# Altium PCB PCB_Tutorial_REV1.PcbDoc
Units mm, origin at the board's own origin, x right, y up, seen from the top; angles counter-clockwise.
Board outline 50.29 x 50.04 mm, 4 copper layers (Sig + GND Top, GND, PWR, Sig + GND Bot), stack 1.57 mm thick; 14 components, 11 nets, 50 pads, 1 vias.
Unrouted connection lines stored in the file: 16.
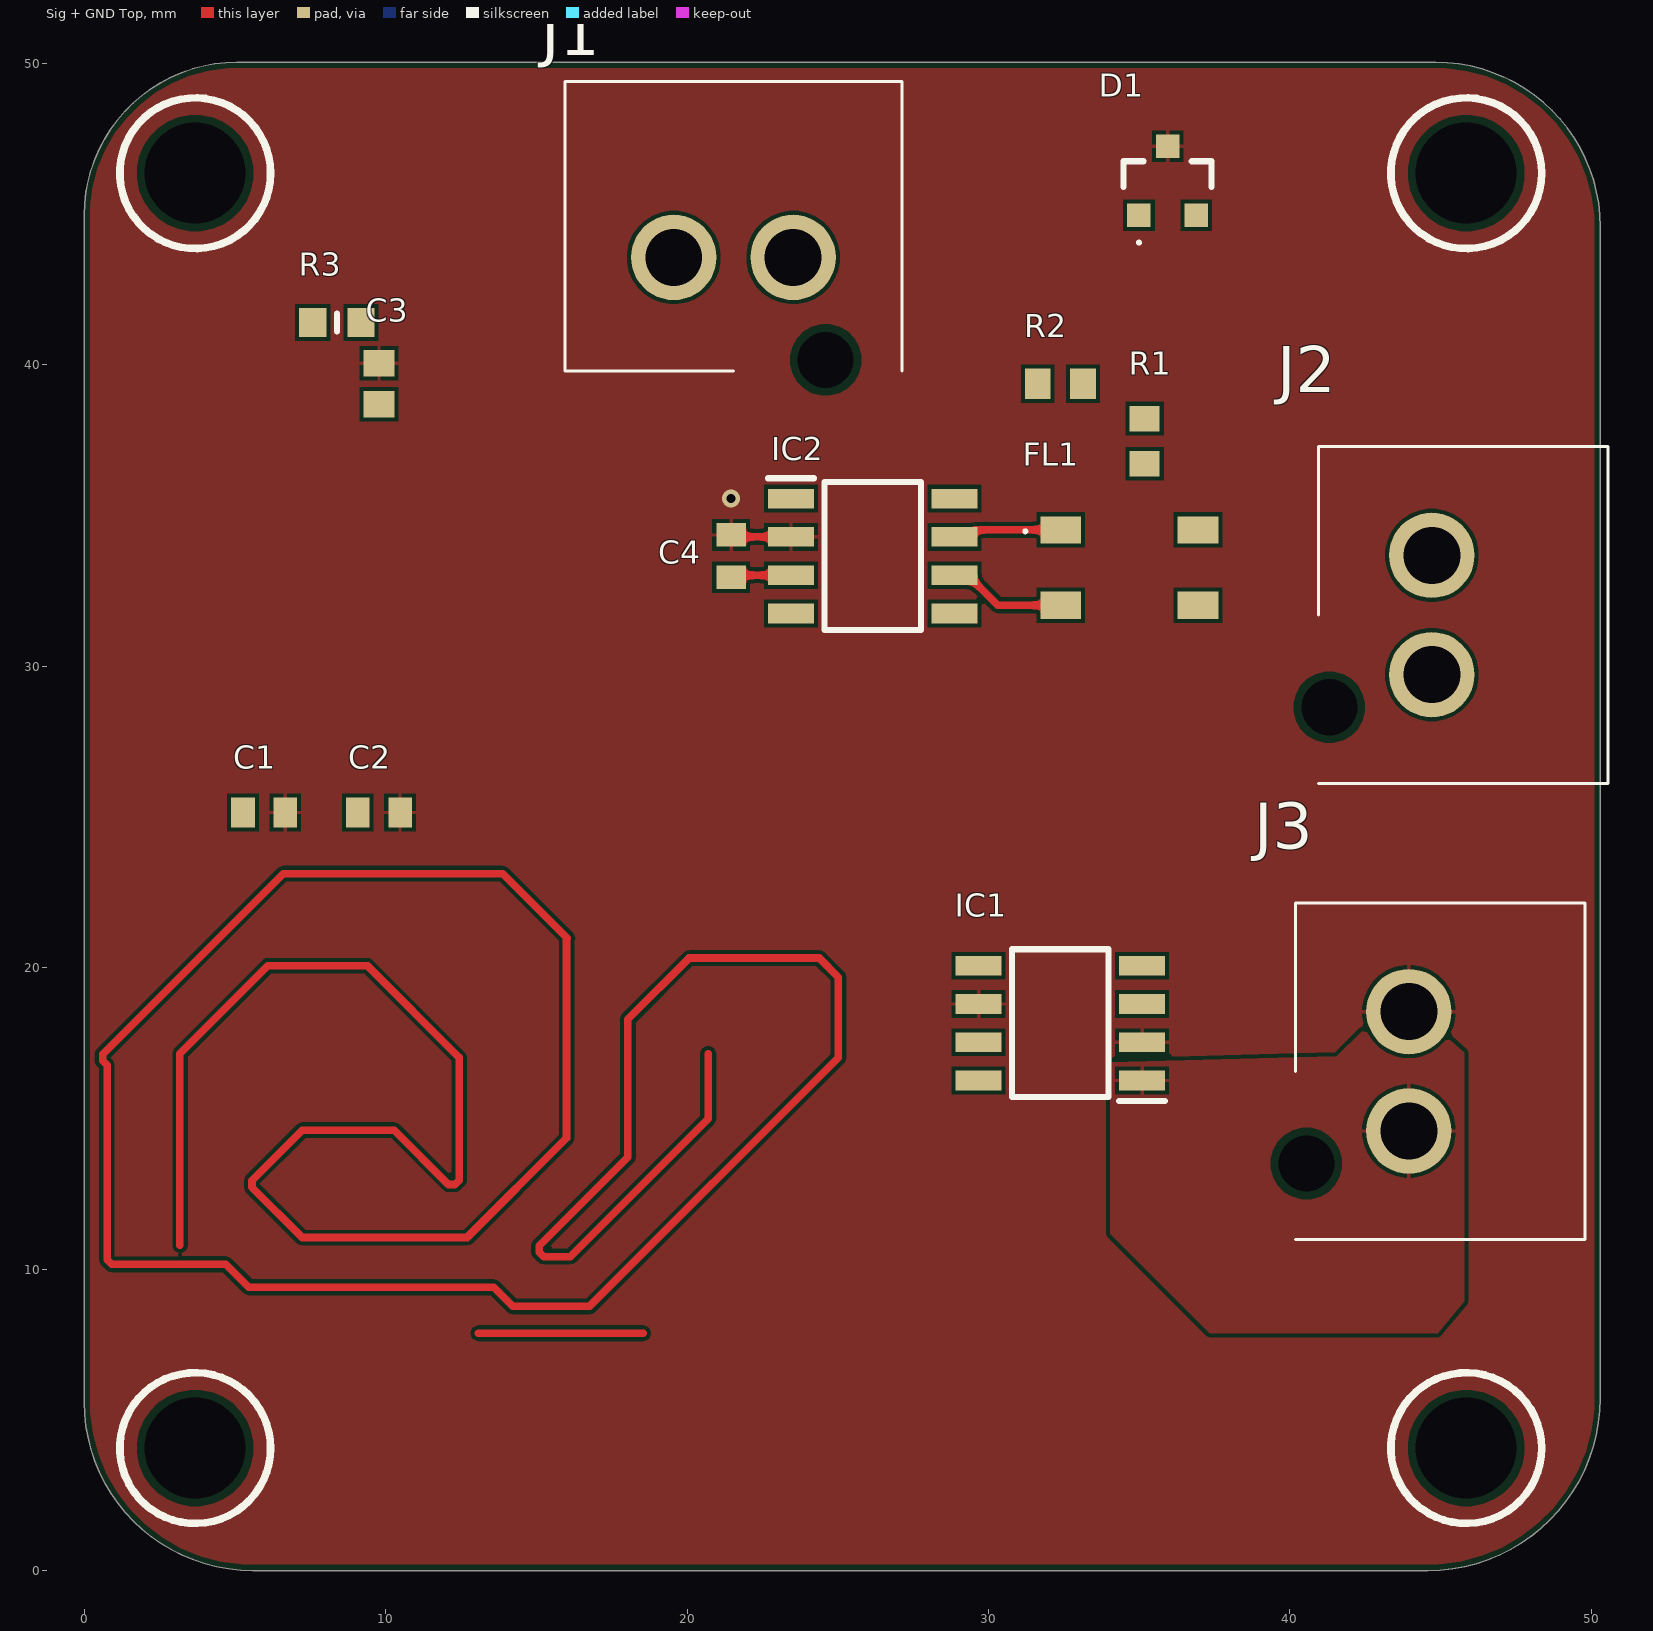
[diagram p0: Sig + GND Top view]
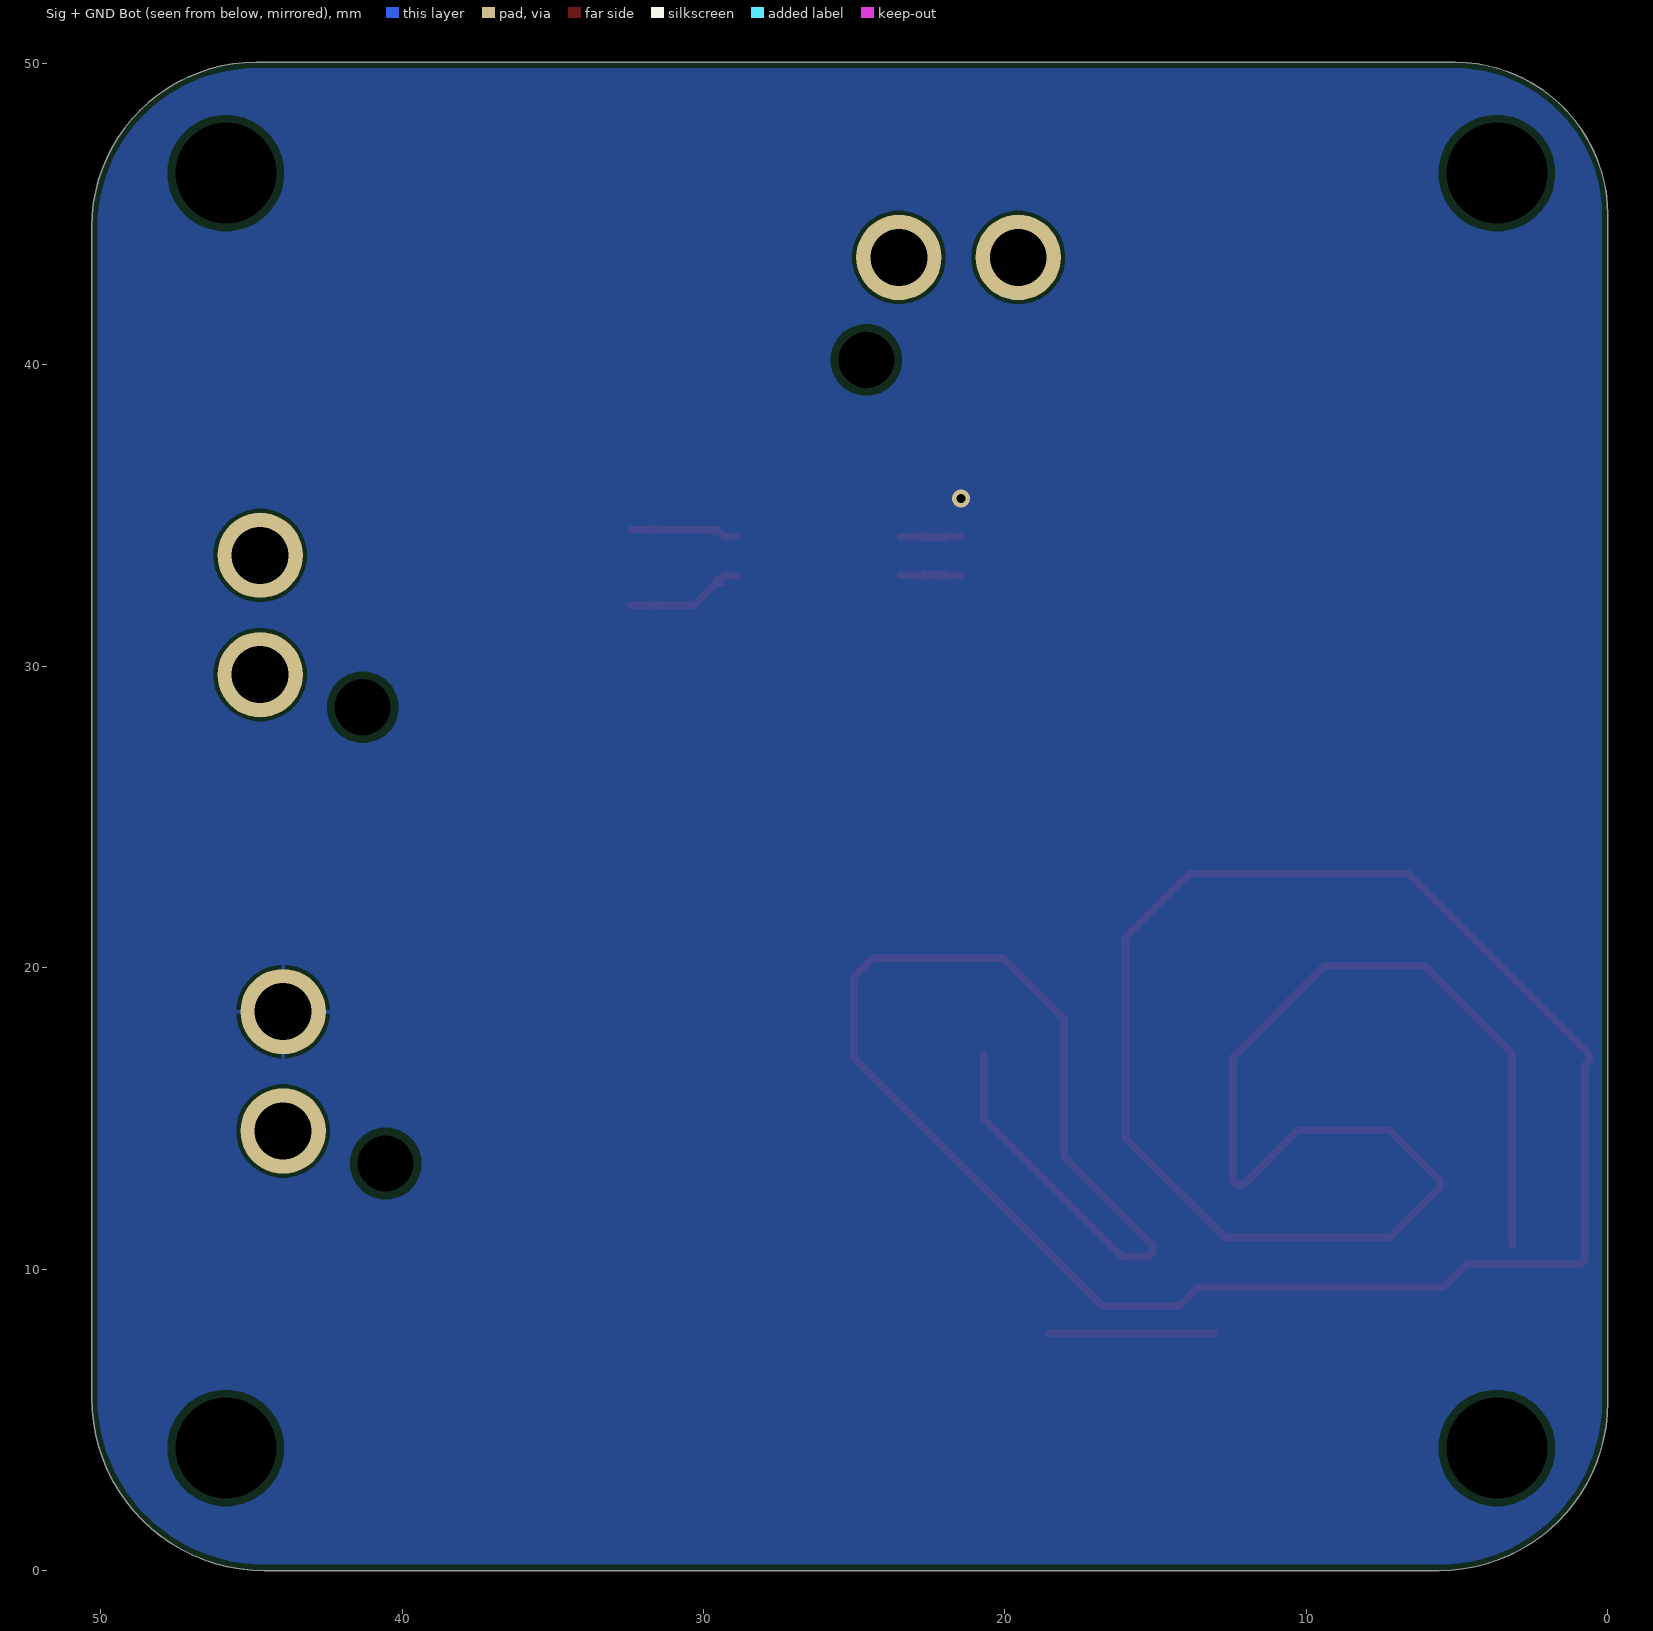
[diagram p1: Sig + GND Bot view, seen from below]
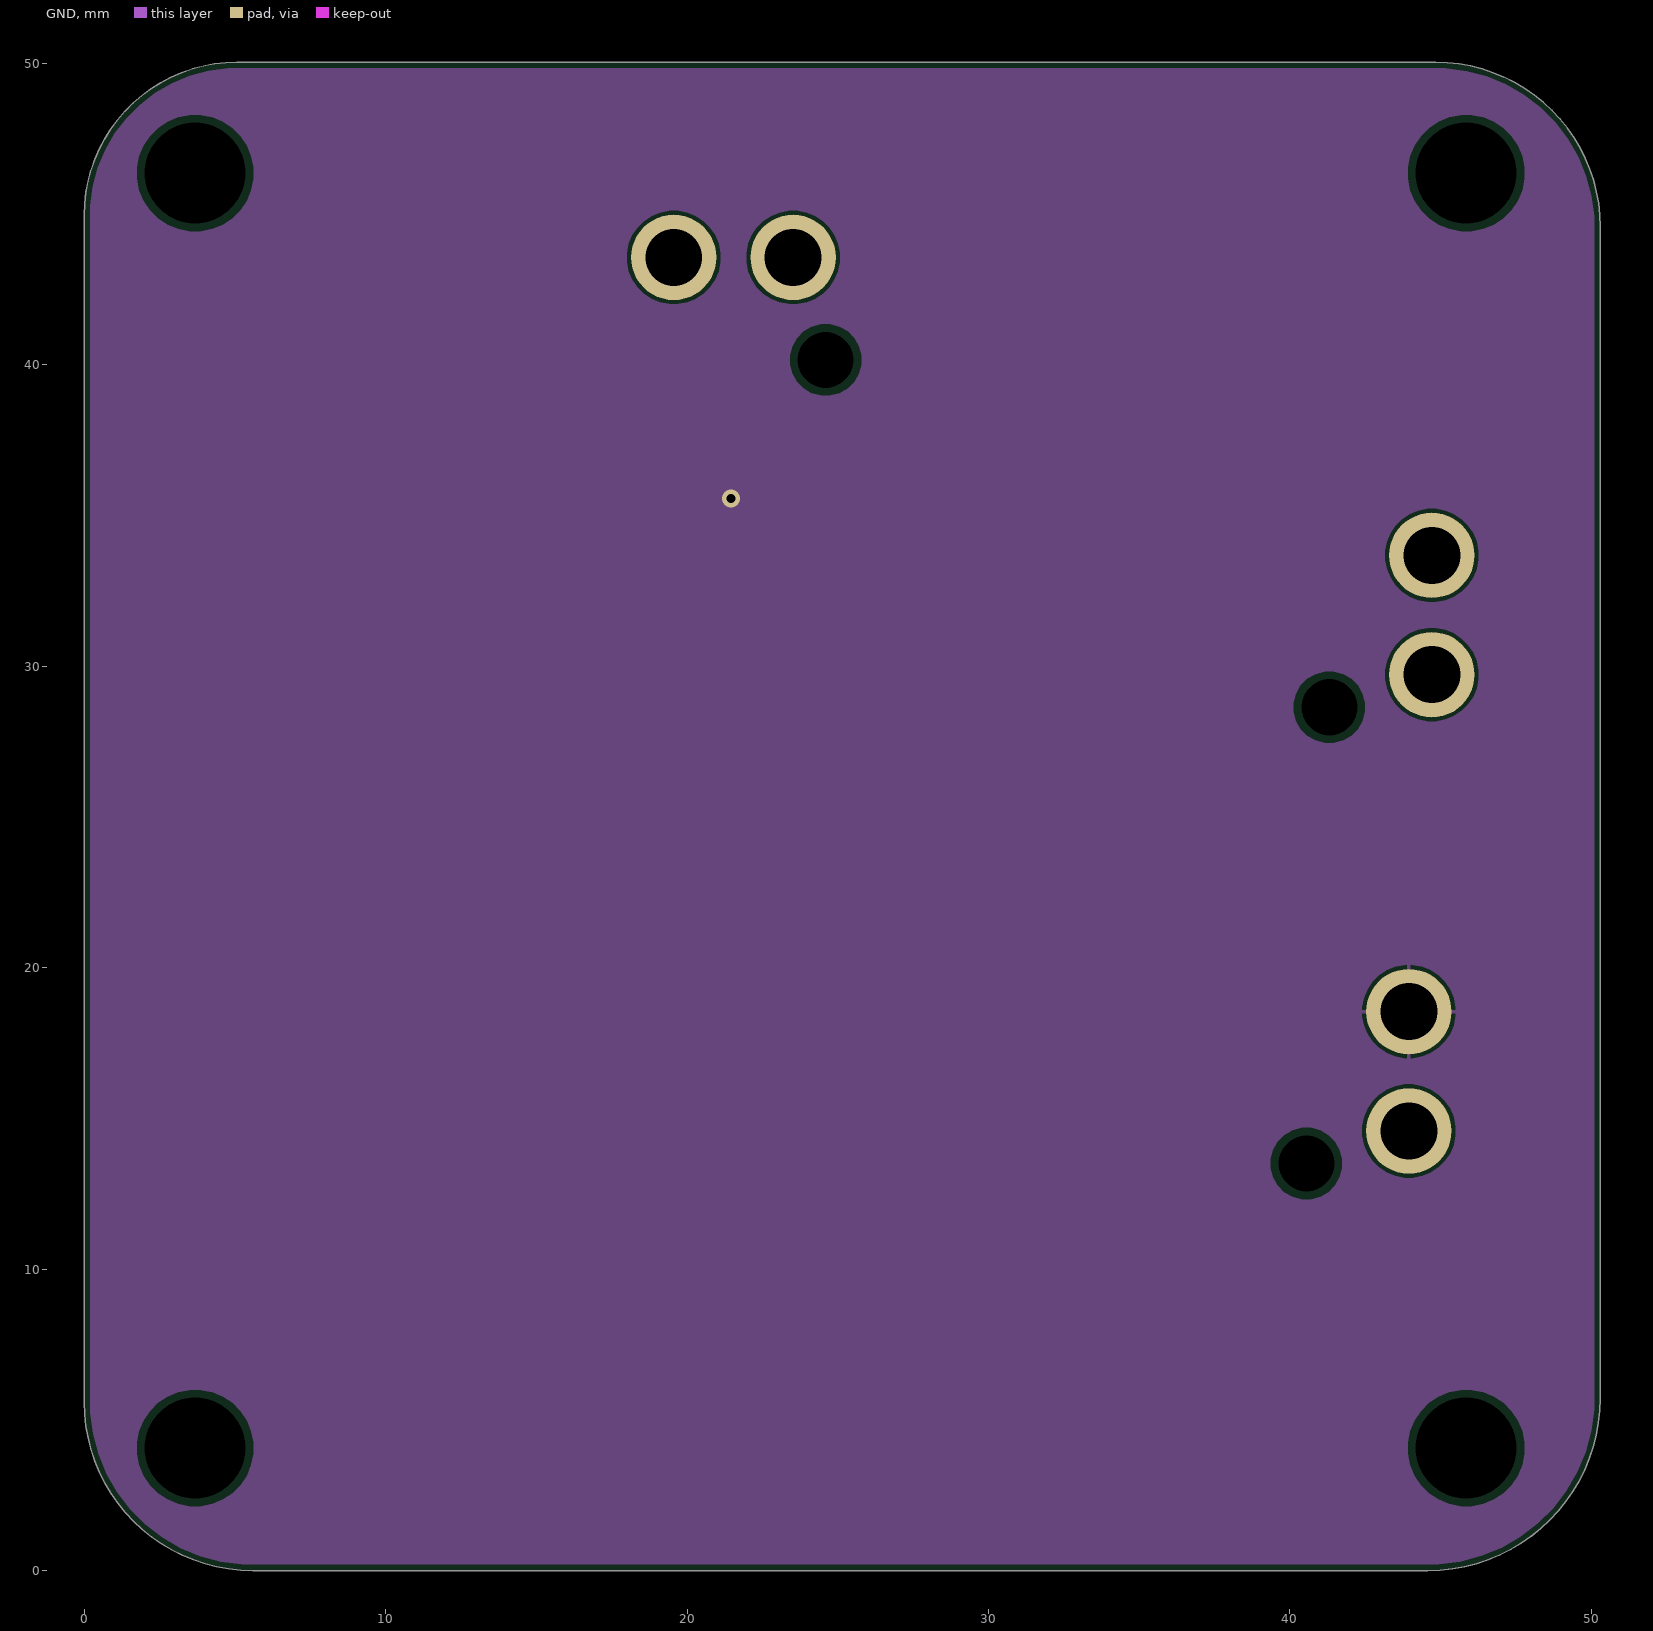
[diagram p2: GND]
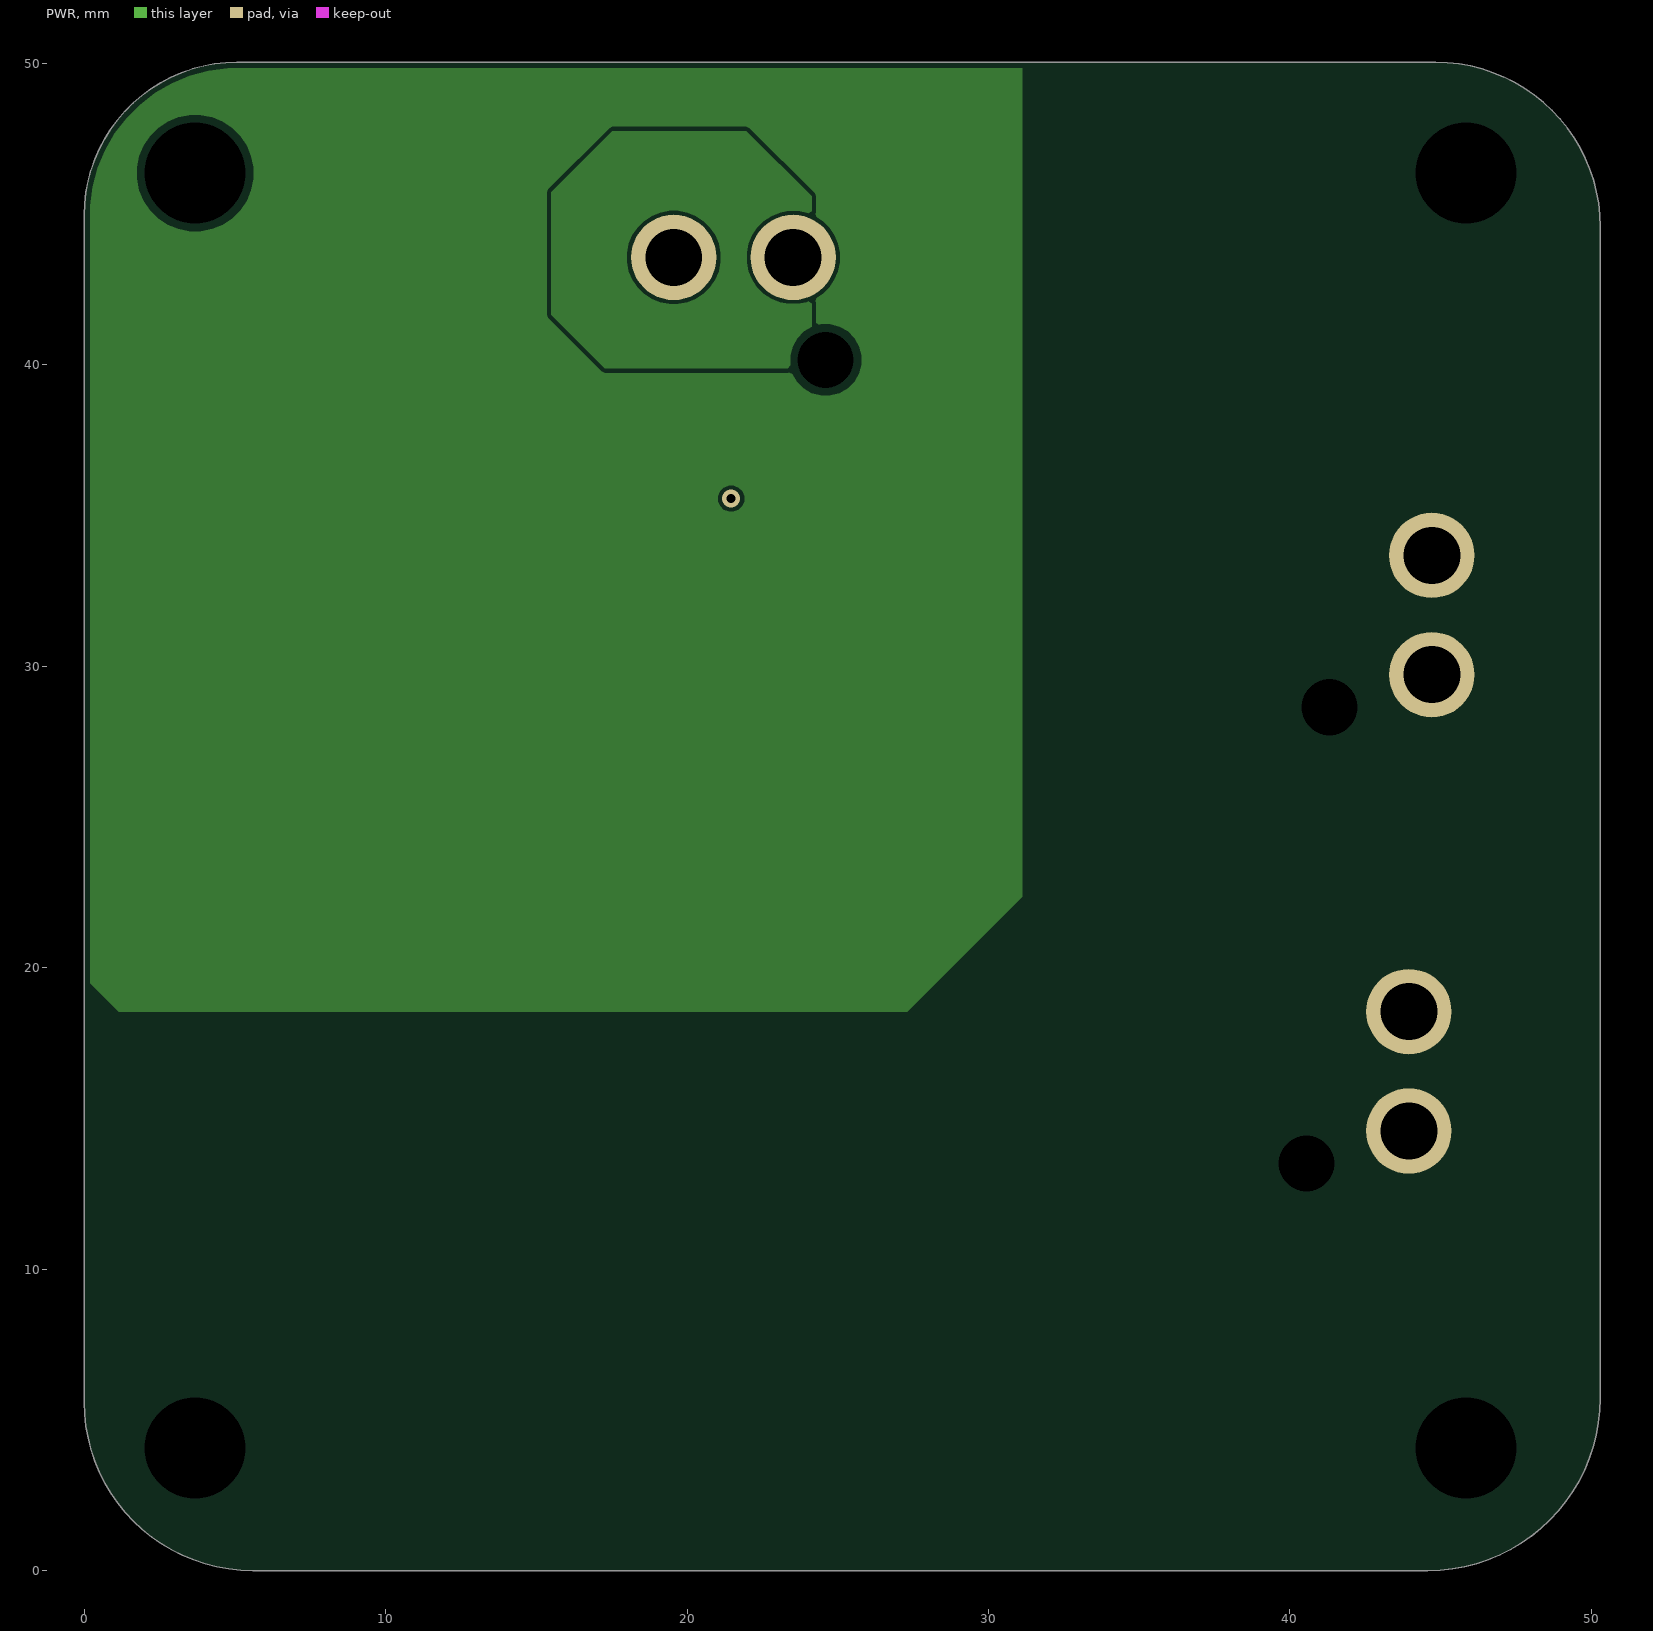
[diagram p3: PWR]

## Layer stack, top to bottom
Top Solder: solder mask 0.0127, Solder Resist, Dk 3.8
Sig + GND Top: signal copper 0.035
Dielectric 1: prepreg 0.2, 7628, Dk 4.6
GND: signal copper 0.0175
Core: core 1.065, FR-4, Dk 4.5
PWR: signal copper 0.0175
Dielectric 2: prepreg 0.2, 7628, Dk 4.6
Sig + GND Bot: signal copper 0.035
Bottom Solder: solder mask 0.0127, Solder Resist, Dk 3.8

## Board outline
0,5.588 0,44.958 cw(c5.08,44.958) 5.08,50.038 44.831,50.038 cw(c44.831,44.577) 50.292,44.577 50.292,5.715 cw(c44.577,5.715) 44.577,0 5.588,0 cw(c5.588,5.588)

## Design rules (kind name [scope] priority, off if disabled: settings)
BoardOutlineClearance [All] p1: gap=0.2 ignorepadtopadclearanceinfootprint=FALSE
Clearance [All] p1: gap=0.127 ignorepadtopadclearanceinfootprint=FALSE except(0.25: Arc-Hole Track-Hole SMDPad-Hole THPad-Hole Via-Hole Fill-Hole Poly-Hole Region-Hole Text-Hole)
ComponentClearance [All] p1: gap=0.127 collisioncheckmode=3 verticalgap=0.127 showdistances=TRUE
DiffPairsRouting [All] p1: maxlimit=0.254 minlimit=0.127 mostfreqgap=0.254 toplayer_prefgap=0.127 toplayer_minwidth=0.127 toplayer_maxwidth=25.4 toplayer_prefwidth=0.127 midlayer1_mingap=0.254 midlayer1_minwidth=0.381 midlayer1_maxwidth=0.381 midlayer1_prefwidth=0.381 midlayer2_mingap=0.254 midlayer2_minwidth=0.381 midlayer2_maxwidth=0.381 midlayer2_prefwidth=0.381 bottomlayer_prefgap=0.127 bottomlayer_minwidth=0.127 bottomlayer_maxwidth=25.4 bottomlayer_prefwidth=0.127 maxuncoupledlength=12.7
Height [All] p1: minheight=0 maxheight=1816.048 prefheight=12.7
HoleSize [All] p1: absolutevalues=TRUE maxlimit=6.3 minlimit=0.3 maxpercent=80.000 minpercent=20.000
HoleToHoleClearance [All] p1: gap=0.25 allowstackedmicrovias=FALSE
MinimumAnnularRing [All] p1: minimumring=0.076
MinimumSolderMaskSliver [All] p1: minsoldermaskwidth=0
PlaneClearance [All] p1: clearance=0.127
PlaneConnect PlaneConnectPowerPads [InPadClass('PowerPads')] p1: planeconnectstyle=Direct reliefexpansion=0.508 reliefentries=4 reliefconductorwidth=0.254 reliefairgap=0.254
PlaneConnect [All] p2: pad.planeconnectstyle=Relief pad.reliefexpansion=0.3 pad.reliefentries=4 pad.reliefconductorwidth=0.127 pad.reliefairgap=0.127 via.planeconnectstyle=Direct via.reliefexpansion=0.3 via.reliefentries=4 via.reliefconductorwidth=0.127 via.reliefairgap=0.127
PolygonConnect PolygonConnectPowerPads [All vs (InPadClass('PowerPads'))] p1: connectstyle=Direct reliefconductorwidth=0.254 reliefentries=4 polygonreliefangle="90 Angle" airgapwidth=0.254
PolygonConnect [All] p2: thpad.connectstyle=Relief thpad.reliefconductorwidth=0.127 thpad.reliefentries=4 thpad.polygonreliefangle="90 Angle" thpad.airgapwidth=0.127 smdpad.connectstyle=Relief smdpad.reliefconductorwidth=0.127 smdpad.reliefentries=4 smdpad.polygonreliefangle="90 Angle" smdpad.airgapwidth=0.127 via.connectstyle=Direct via.reliefconductorwidth=0.127 via.reliefentries=4 via.polygonreliefangle="90 Angle" via.airgapwidth=0.127
RoutingVias [All] p1: holewidth=0.3 width=0.6 viastyle="Through Hole" minholewidth=0.3 minwidth=0.6 maxholewidth=0.6 maxwidth=6.6
SilkToSilkClearance [All] p1: silktosilkclearance=0
SilkToSolderMaskClearance [IsPad] p1: minsilkscreentomaskgap=0.127 clearancetoexposedcopper=TRUE
SolderMaskExpansion [All] p1: expansion=0.075 istentingtop=FALSE
SupplyNets "Schematic Supply Nets" [InNet('GND')] p1: voltage=0.000
Width [All] p1: maxlimit=25.4 minlimit=0.127 preferedwidth=0.127 midlayer1_maxwidth=0.254 midlayer2_maxwidth=0.254 minimp=50.000000 maximp=50.000000 favimp=50.000000
20 further rules are at their usual default settings.

## Classes and differential pairs
differential pair class diffc: CAN CANC
differential pair class diffc1: CANC
component class "This is my A Schematic Document": C1 C2 C3 C4 D1 FL1 IC1 IC2 R1 R2 R3
component class Connectors: J1 J2 J3
differential pair CANC: +CANC_P -CANC_N
differential pair CAN: +CAN_P -CAN_N

## Components (designator, comment, footprint, x,y, rotation, side; value= is the part's Value field where it differs from the comment)
C1 "10u" CAPC1608X90N 5.969,25.146 r0 top
C2 "100n" CAPC1608X90N 9.779,25.146 r0 top
C3 "4.7n" CAPC1608X95N 9.779,39.37 r90 top
C4 "100n" CAPC1608X90N 21.463,33.655 r90 top
D1 "SM24CANB-02HTG" SM24CANB02HTG 35.941,46.101 r0 top
FL1 "ACT45B-510-2P-TL003" ACT45B1012PTL003 34.671,33.274 r0 top
IC1 "MCP3422A1T-E_SN" SOIC127P600X175-8N 32.385,18.161 r180 top
IC2 "TCAN337GD" SOIC127P600X175-8N 26.162,33.655 r0 top
J1 "1877285-2" 18772852 21.538,39.801 r180 top
J2 "1877285-2" 18772852 40.944,31.698 r90 top
J3 "1877285-2" 18772852 40.182,16.562 r90 top
R1 "60.4" RESC1608X50N 35.179,37.465 r90 top
R2 "60.4" RESC1608X50N 32.385,39.37 r0 top
R3 "10k" RESC1608X55N 8.382,41.402 r0 top

## Footprints (in the part's own frame and the unit in brackets; to place one, negate y for a bottom-side part, rotate by r counter-clockwise, add the part's x,y. Pads: shape width x height; smd on the part's side, far side on the other; paste and mask are expansions set on the pad)
18772852 [mm]
  round 2.835 hole 1.89: 1(-1.98,-3.76) 2(1.98,-3.76)
  round 0.93 hole 1.86 unplated: 3(-3.06,-0.36)
  silkscreen extent -5.59,-9.6 5.59,0, body extent -5.59,-9.58 5.59,0.3, height 11.91
ACT45B1012PTL003 [mm]
  rect 1.35x0.9 smd: 1(-2.275,1.25) 2(-2.275,-1.25) 3(2.275,-1.25) 4(2.275,1.25)
  silkscreen extent -3.5,1.15 -3.4,1.25, body extent -2.22,-1.6 2.28,1.6, height 2.8
CAPC1608X90N [mm]
  rect 0.78x0.99 smd: 1(-0.7,0) 2(0.7,0)
  body extent -0.76,-0.38 0.76,0.38, height 0.91
CAPC1608X95N [mm]
  rect 0.87x1.02 smd: 1(-0.68,0) 2(0.68,0)
  body extent -0.8,-0.4 0.8,0.4, height 0.95
RESC1608X50N [mm]
  rect 0.85x1 smd: 1(-0.75,0) 2(0.75,0)
  body extent -0.77,-0.43 0.78,0.42, height 0.45
RESC1608X55N [mm]
  rect 0.9x0.95 smd: 1(-0.8,0) 2(0.8,0)
  silkscreen extent 0,-0.3 0,0.3, body extent -0.8,-0.4 0.8,0.4, height 0.55
SM24CANB02HTG [mm]
  rect 0.78x0.78 smd: 1(-0.95,-1.145) 2(0.95,-1.145) 3(0,1.145)
  silkscreen extent -1.46,-2.1 1.46,0.65, body extent -1.46,-1.18 1.46,1.18, height 1.12
SOIC127P600X175-8N [mm]
  rect 1.525x0.65 smd: 1(-2.712,1.905) 2(-2.712,0.635) 3(-2.712,-0.635) 4(-2.712,-1.905) 5(2.712,-1.905) 6(2.712,-0.635) 7(2.712,0.635) 8(2.712,1.905)
  silkscreen extent -3.47,-2.45 1.6,2.58, body extent -3,-2.45 3,2.45, height 1.75

## Part data
C1: library part CL10A106KQ8NNNL, "Capacitor", Manufacturer_Name=SAMSUNG, Mouser Part Number=N/A, Arrow Part Number=CL10A106KQ8NNNL, Arrow Price/Stock=https://www.arrow.com/en/products/cl10a106kq8nnnl/samsung-electro-mechanics, Datasheet Link=https://product.samsungsem.com/mlcc/basic-search.do?partNumber=CL10A106KQ8NNN, Height=0.9mm, Manufacturer_Part_Number=CL10A106KQ8NNNL, Mouser Price/Stock=https://www.mouser.com/Search/Refine.aspx?Keyword=N%2FA
C2 C4: library part 06035C104J4Z2A, "Capacitor", Manufacturer_Name="Kyocera AVX", Mouser Part Number=581-06035C104J4Z2A, Arrow Part Number=06035C104J4Z2A, Arrow Price/Stock=https://www.arrow.com/en/products/06035c104j4z2a/avx, Datasheet Link=https://componentsearchengine.com/Datasheets/1/06031A100FAT2A.pdf, Height=0.9mm, Manufacturer_Part_Number=06035C104J4Z2A, Mouser Price/Stock=https://www.mouser.co.uk/ProductDetail/KYOCERA-AVX/06035C104J4Z2A?qs=Awwwc1gvTnlncvTGCFZvkw%3D%3D
C3: library part 0603B472M500CT, "Capacitor", Manufacturer_Name="Walsin Technology Corporation", Datasheet Link=https://www.passivecomponent.com/wp-content/uploads/datasheet/WTC_MLCC_General_Purpose.pdf, Height=0.95mm, Manufacturer_Part_Number=0603B472M500CT
D1: "TVS Diode (Bi-directional)", Manufacturer_Name=LITTELFUSE, Mouser Part Number=576-SM24CANB-02HTG, Arrow Part Number=SM24CANB-02HTG, Arrow Price/Stock=https://www.arrow.com/en/products/sm24canb-02htg/littelfuse?utm_currency=USD&region=nac, Datasheet Link=https://www.littelfuse.com/products/overvoltage-protection/tvs-diode-arrays/general-purpose/sm24canb/sm24canb-02htg, Height=1.12mm, Manufacturer_Part_Number=SM24CANB-02HTG, Mouser Price/Stock=https://www.mouser.co.uk/ProductDetail/Littelfuse/SM24CANB-02HTG?qs=bWsWnctWn1wbKmCYlcUmHw%3D%3D
FL1: "Filter", Manufacturer_Name=TDK, Mouser Part Number=810-ACT45B5102PTL003, Arrow Part Number=ACT45B-510-2P-TL003, Arrow Price/Stock=https://www.arrow.com/en/products/act45b-510-2p-tl003/tdk?utm_currency=USD&region=nac, Datasheet Link=https://product.tdk.com/system/files/dam/doc/product/emc/emc/cmf_cmc/catalog/cmf_automotive_signal_act45b_en.pdf, Height=3mm, Manufacturer_Part_Number=ACT45B-510-2P-TL003, Mouser Price/Stock=https://www.mouser.co.uk/ProductDetail/TDK/ACT45B-510-2P-TL003?qs=U1cgCdF9Le9LCroNYLqljw%3D%3D
IC1: "Integrated Circuit", Arrow Part Number=MCP3422A1T-E/SN, Manufacturer_Name=Microchip, Mouser Part Number=579-MCP3422A1T-E/SN, Arrow Price/Stock=https://www.arrow.com/en/products/mcp3422a1t-esn/microchip-technology, Datasheet Link=https://ww1.microchip.com/downloads/en/DeviceDoc/22088c.pdf, Height=1.75mm, Manufacturer_Part_Number=MCP3422A1T-E/SN, Mouser Price/Stock=https://www.mouser.co.uk/ProductDetail/Microchip-Technology/MCP3422A1T-E-SN?qs=X98pPdo4MrvBbe3HwfJ%252Bfw%3D%3D
IC2: "Integrated Circuit", Manufacturer_Name="Texas Instruments", Mouser Part Number=595-TCAN337GD, Arrow Part Number=TCAN337GD, Arrow Price/Stock=https://www.arrow.com/en/products/tcan337gd/texas-instruments?region=europe, Datasheet Link=https://www.arrow.com/en/products/tcan337gd/texas-instruments, Height=1.75mm, Manufacturer_Part_Number=TCAN337GD, Mouser Price/Stock=https://www.mouser.co.uk/ProductDetail/Texas-Instruments/TCAN337GD?qs=gMfM3zrbS4qmjQESf%252BTgJw%3D%3D
J1 J2 J3: "Connector", Manufacturer_Name="TE Connectivity", Mouser Part Number=571-1877285-2, Arrow Part Number=1877285-2, Arrow Price/Stock=https://www.arrow.com/en/products/1877285-2/te-connectivity?region=europe, Datasheet Link=https://www.te.com/commerce/DocumentDelivery/DDEController?Action=srchrtrv&DocNm=7-1773458-5_ECONOMY_POWER_QRG&DocType=Data%20Sheet&DocLang=English&PartCntxt=1877285-2&DocFormat=pdf, Height=12mm, Manufacturer_Part_Number=1877285-2, Mouser Price/Stock=https://www.mouser.co.uk/ProductDetail/TE-Connectivity/1877285-2?qs=ka3zfMQDmFlAIZq5pDt5JA%3D%3D
R1 R2: library part CRCW060360R4FKEA, "Resistor", Manufacturer_Name=Vishay, Mouser Part Number=71-CRCW0603-60.4-E3, Arrow Part Number=CRCW060360R4FKEA, Arrow Price/Stock=https://www.arrow.com/en/products/crcw060360r4fkea/vishay, Datasheet Link=http://www.vishay.com/docs/20035/dcrcwe3.pdf, Height=0.5mm, Manufacturer_Part_Number=CRCW060360R4FKEA, Mouser Price/Stock=https://www.mouser.co.uk/ProductDetail/Vishay-Dale/CRCW060360R4FKEA?qs=6fyMJ9%2FiJ9KMVX8MBWVfDg%3D%3D
R3: library part CRGCQ0603F10K, "Resistor", Manufacturer_Name="TE Connectivity", Mouser Part Number=279-CRGCQ0603F10K, Arrow Part Number=CRGCQ0603F10K, Arrow Price/Stock=https://www.arrow.com/en/products/crgcq0603f10k/te-connectivity?region=nac, Datasheet Link=https://www.te.com/commerce/DocumentDelivery/DDEController?Action=showdoc&DocId=Data+Sheet%7F1773204-3%7F1%7Fpdf%7FEnglish%7FENG_DS_1773204-3_1.pdf%7F5-2176339-2, Height=0.55mm, Manufacturer_Part_Number=CRGCQ0603F10K, Mouser Price/Stock=https://www.mouser.co.uk/ProductDetail/TE-Connectivity-Holsworthy/CRGCQ0603F10K?qs=wUXugUrL1qxhM765MzQWJg%3D%3D

## Free pads (board coordinates)
  round 1.524 hole 3.35 unplated: 1(3.683,4.064) 1(3.683,46.355) 1(45.847,4.064) 1(45.847,46.355)

## Via types
v1: diameter 0.6, hole 0.3, Sig + GND Top to Sig + GND Bot, 1 vias

## Nets (pads, with @x,y where several pads share a name; then routed paths per layer and width w, separated by ;. In a path a pad name is that pad's centre, name@x,y a point inside that pad or via, vN(x,y) a via of type N, cw(c..) or ccw(c..) an arc to the next point about the centre after c; other vN are vias at no path point)
3.3V: C1.1 C2.1 C4.1 IC1.3 IC2.3 R3.2 | length 2
  Sig + GND Top w0.254: C4.1 21.528,33.02 IC2.3
CAN_N: D1.2 FL1.3 J1.2 R2.1
CAN_P: D1.1 FL1.4 J1.1 R1.1
CANC_N: FL1.2 IC2.6 | length 3.9
  Sig + GND Top w0.254: IC2.6 29.312,33.02 30.308,32.024 FL1.2
CANC_P: FL1.1 IC2.7 | length 3.6
  Sig + GND Top w0.254: IC2.7 29.312,34.29 29.546,34.524 FL1.1
GND: C1.2 C2.2 C3.2 C4.2 D1.3 IC1.2 IC1.6 IC2.2 J3.2 | length 135.3
  Sig + GND Top w0.254: 3.175,10.795 3.175,17.145 6.096,20.066 9.398,20.066 12.446,17.018 12.446,12.954 12.297,12.805 12.087,12.805 10.287,14.605 7.239,14.605 5.566,12.932 5.566,12.722 7.239,11.049 12.7,11.049 16.002,14.351 16.002,20.955 16.024,20.977 13.887,23.114 6.604,23.114 0.613,17.123 0.613,16.913 0.762,16.764 0.762,10.309 0.911,10.16 4.699,10.16 5.461,9.398 13.589,9.398 14.224,8.763 16.764,8.763 25.019,17.018 25.019,19.685 24.384,20.32 20.066,20.32 18.034,18.288 18.034,13.716 15.091,10.773 15.091,10.563 15.24,10.414 16.129,10.414 20.701,14.986 20.701,17.145 ; C4.2 21.528,34.29 IC2.2
  other v1: 21.463,35.56
NetC3_1: C3.1 R1.2 R2.2
NetIC2_5: IC2.5 R3.1
SCL: IC1.5 J2.2
SDA: IC1.4 J2.1
Vin: IC1.1 J3.1
pads on no net: IC1.7 IC1.8 IC2.1 IC2.4 IC2.8 J1.3 J2.3 J3.3
copper on no net: | length 5.5
  Sig + GND Top w0.254: 13.081,7.874 18.542,7.874

## Polygon pours and split planes (outlines as drawn)
GND on Sig + GND Top "GND_L01_P003" (solid, pour order 3): -0.012,0.015 -0.012,50.815 52.693,50.815 52.693,0.015
Vin on Sig + GND Top "VIN_L01_P000" (solid, pour order 0): 42.491,17.98 41.558,17.067 38.96,16.994 34.036,16.857 34.036,11.176 37.338,7.874 44.903,7.874 45.783,8.94 45.777,17.184 44.831,18.034
GND on Sig + GND Bot "GND_L04_P001" (solid, pour order 1): 0,0 0,50.8 52.705,50.8 52.705,0
GND on GND "GND_L02_P002" (solid, pour order 2): -0.012,0.015 -0.012,50.815 52.693,50.815 52.693,0.015
no net on PWR "NONET_L03_P035" (solid, pour order 35): 17.526,47.752 15.494,45.72 15.494,41.656 17.272,39.878 23.368,39.878 24.13,40.64 24.13,45.593 21.971,47.752
no net on PWR "NONET_L03_P036" (solid, pour order 36): 0,51.308 0,19.685 1.143,18.542 27.305,18.542 31.115,22.352 31.115,51.816 28.956,53.975 2.667,53.975

## Silkscreen, mask and mechanical layers (free items; w line width, h text height)
Top Overlay:
  circle w0.254: c45.847,46.355 r2.5
  circle w0.254: c45.847,4.064 r2.5
  circle w0.254: c3.683,4.064 r2.5
  circle w0.254: c3.683,46.355 r2.5
Mechanical 1:
  the board outline again, w0.254